# Altium PCB 8161芯片-FSK调试板-V20.PcbDoc
Units mm, origin at the board's own origin, x right, y up, seen from the top; angles counter-clockwise.
Board outline 30 x 31.6 mm, 2 copper layers (Top Layer, Bottom Layer), stack 1.001 mm thick; 63 components, 49 nets, 207 pads, 327 vias.
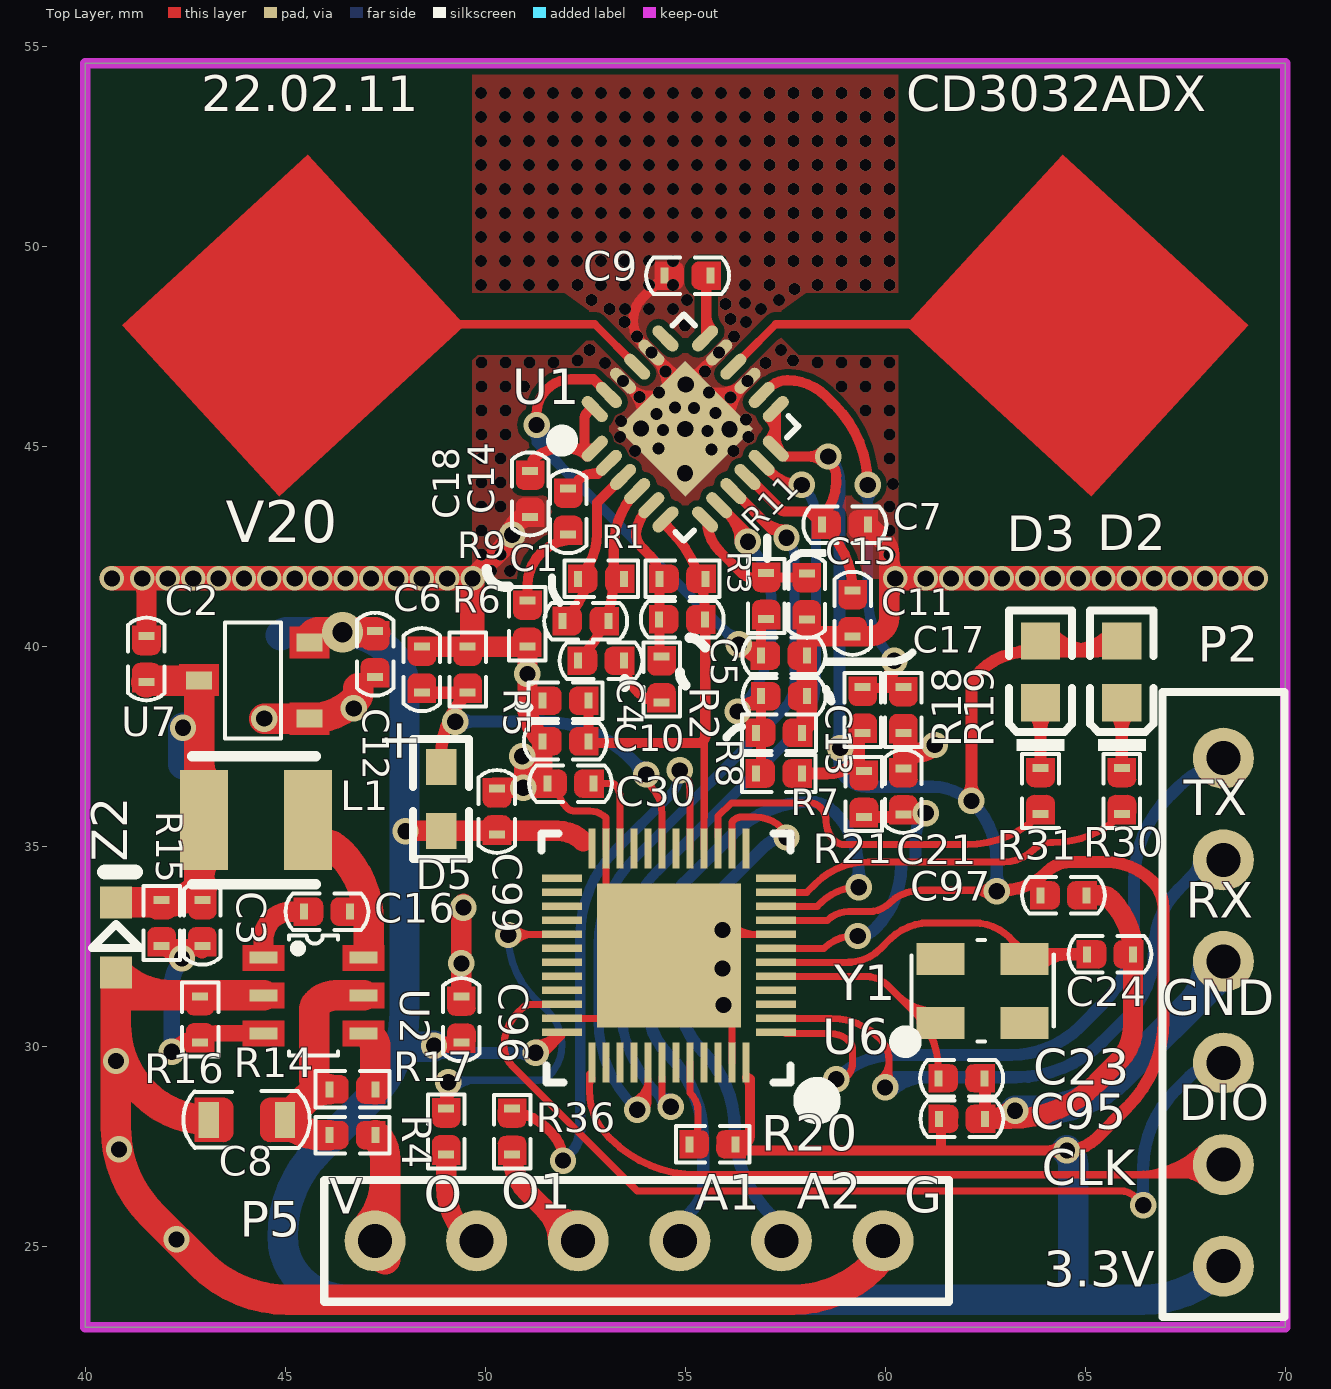
[diagram p0: Top Layer view]
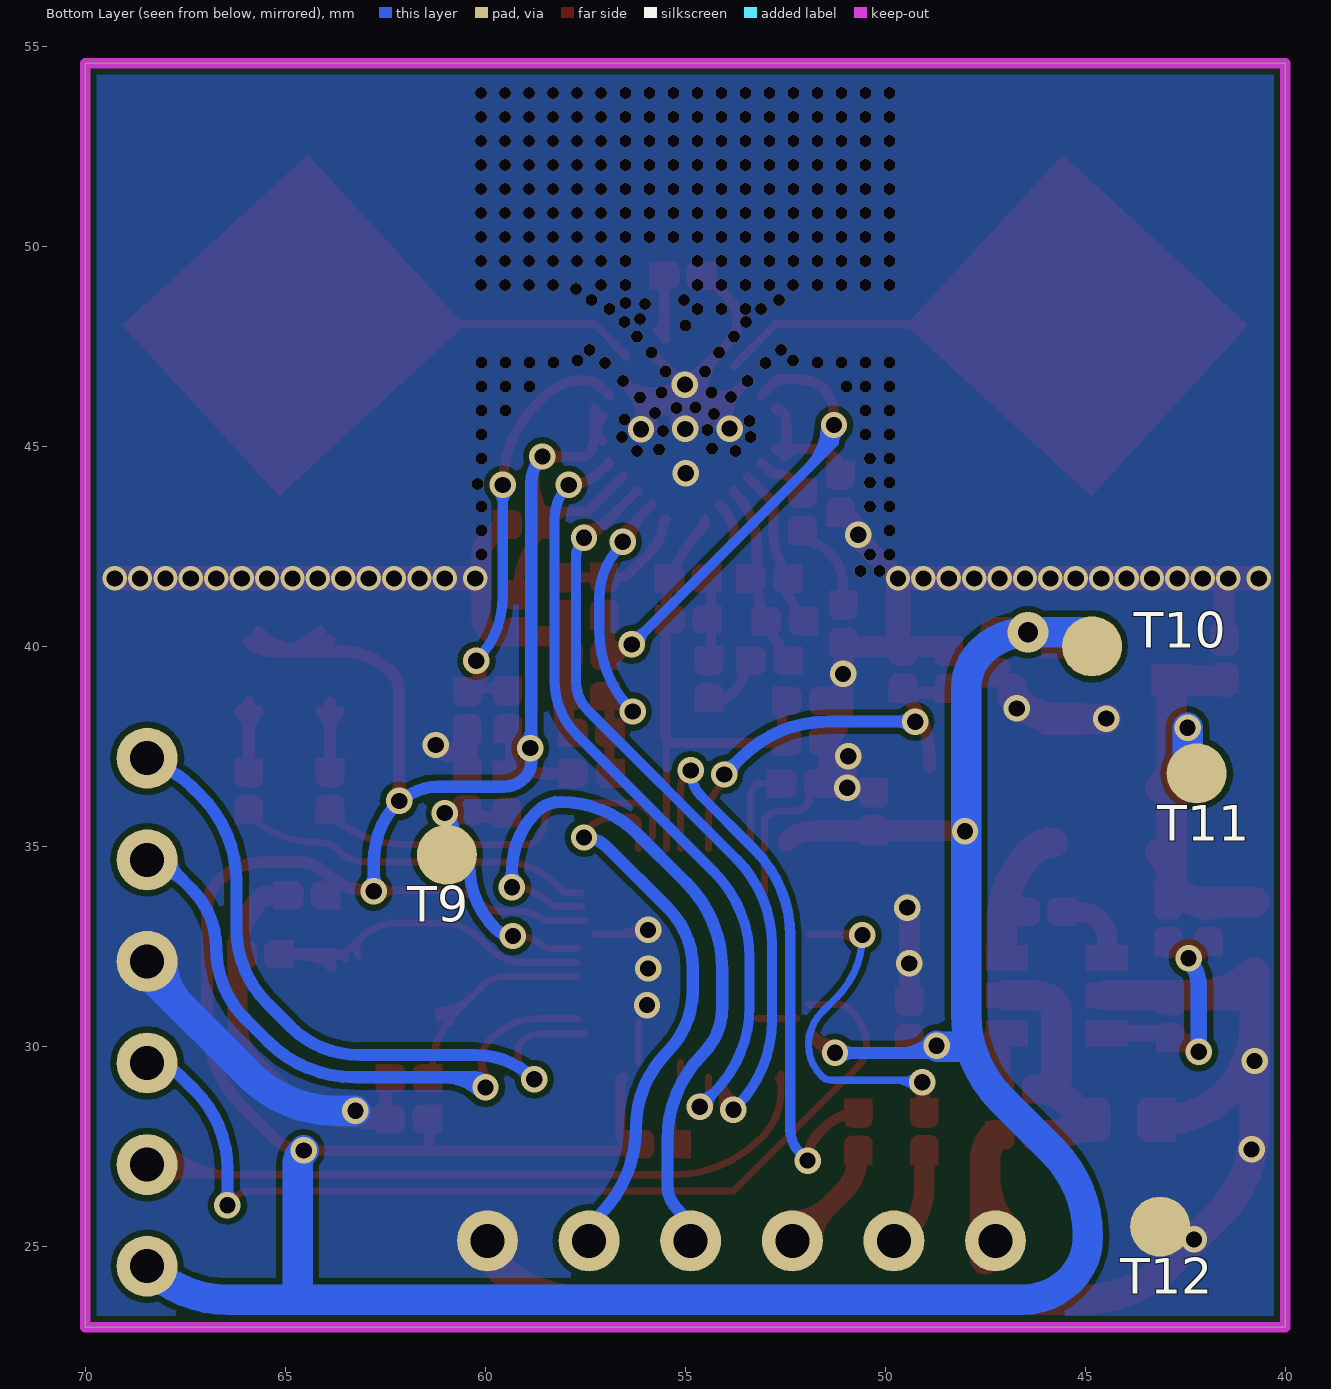
[diagram p1: Bottom Layer view, seen from below]

## Layer stack, top to bottom
Top Layer: signal copper 0.0356
Dielectric: core 0.93, FR-4, Dk 4.8
Bottom Layer: signal copper 0.0356

## Board outline
40,22.987 40,54.585 70,54.585 70,22.987

## Design rules (kind name [scope] priority, off if disabled: settings)
Clearance [All] p1: gap=0.152
ComponentClearance [All] p1: gap=0.254 collisioncheckmode=3 verticalgap=0.254
PolygonConnect [All] p1: connectstyle=Direct reliefconductorwidth=0.254 reliefentries=4 polygonreliefangle="90 Angle"
RoutingVias [All] p1: holewidth=0.711 width=1.27 viastyle="Through Hole" minholewidth=0.381 minwidth=0.66 maxholewidth=0.711 maxwidth=1.27
SolderMaskExpansion [All] p1: expansion=0.102
TestPointUsage [All] p1: valid=0 allowmultiple=FALSE
Testpoint [All] p1: side=3 testpointundercomponent=TRUE minsize=1.016 maxsize=2.54 preferedsize=1.524 minholesize=0 maxholesize=1.016 preferedholesize=0.813 testpointgrid=0.025 style=297 order=0123456789
Width [All] p1: maxlimit=0.762 minlimit=0.178 preferedwidth=0.254
18 further rules are at their usual default settings.

## Components (designator, comment, footprint, x,y, rotation, side; value= is the part's Value field where it differs from the comment)
C1 "10nF" C0402#1 53.086,40.64 r180 top (schematic designator C16)
C2 "10uF" C0402#1 41.529,39.116 r90 top (schematic designator C16)
C3 "22pF" C0402#1 42.926,32.512 r90 top (schematic designator C16)
C4 "10uF" C0402#1 53.467,39.649 r180 top (schematic designator C16)
C5 "51nF" C0402#1 55.499,40.681 r180 top (schematic designator C16)
C6 "0.1uF" C0402#1 48.415,38.85 r90 top (schematic designator C16)
C7 "100nF" C0402#1 59.563,43.053 r180 top (schematic designator C16)
C8 "10uF/16V" C0603 44.966,28.169 r180 top
C9 "10uF" C0402#1 54.483,49.276 r0 top (schematic designator C16)
C10 "0.1uF" C0402#1 52.578,37.633 r180 top
C11 "10uF" C0402#1 59.182,40.259 r90 top (schematic designator C16)
C12 "10uF" C0402#1 47.244,40.386 r270 top (schematic designator C16)
C13 "10uF" C0402#1 56.896,38.76 r0 top (schematic designator C16)
C14 "10uF" C0402#1 52.07,42.799 r90 top (schematic designator C16)
C15 "10uF" C0402#1 58.039,41.834 r270 top (schematic designator C16)
C16 "0.1uF" C0402#1 46.617,33.376 r180 top
C17 "10uF" C0402#1 58.039,39.776 r180 top (schematic designator C16)
C18 "10uF" C0402#1 51.12,43.246 r90 top (schematic designator C16)
C21 "100nF" C0402#2 60.452,36.957 r270 top
C23 "12pF" C0402#2 62.484,29.21 r180 top
C24 "12pF" C0402#2 66.192,32.309 r180 top
C30 "100nF" C0402#2 52.705,36.576 r180 top
C95 "10uF/6.3V" C0402#2 61.341,28.194 r0 top
C96 "0.1uF/50V" C0402#2 49.403,30.099 r90 top
C97 "0.1uF/50V" C0402#2 63.881,33.782 r0 top
C99 "0.1uF/50V" C0402#2 50.292,35.306 r90 top
D2 "红灯" LC-0603_LED_S1 65.913,39.37 r90 top
D3 "绿灯" LC-0603_LED_S1 63.881,39.37 r90 top
D5 "PT19-21C" LED-0603 48.895,36.195 r270 top
L1 "PRS3015-100MT" PRS3015 45.669,35.662 r180 top
P2 "DIP1X6-2.54mm" DIP1X6-2.54 68.453,24.511 r90 top locked
P5 "DIP1X6-2.54mm" DIP1X6-2.54 47.244,25.146 r0 top locked
R1 "100k" R0402#1 52.324,41.697 r0 top (schematic designator R14)
R2 "10k" R0402#1 54.407,38.608 r90 top (schematic designator R14)
R3 "NC" R0402#1 54.356,41.697 r0 top (schematic designator R14)
R4 "5.6" R0402#1 47.252,27.788 r180 top (schematic designator R14)
R5 "12K" R0402#1 52.578,38.649 r180 top (schematic designator R14)
R6 "47k" R0402#1 49.558,38.85 r90 top (schematic designator R14)
R7 "20k" R0402#1 57.912,36.83 r180 top (schematic designator R14)
R8 "10k" R0402#1 56.769,37.846 r0 top (schematic designator R14)
R9 "0R" R0402#1 51.054,41.148 r270 top (schematic designator R14)
R11 "10k" R0402#1 57.023,40.691 r90 top (schematic designator R14)
R14 "47k" R0402#1 47.252,28.931 r180 top
R15 "25.5k" R0402#1 41.91,32.512 r90 top
R16 "5.1k" R0402#1 42.87,31.259 r270 top
R17 "200" R0402#1 49.022,27.305 r90 top (schematic designator R14)
R18 "10k/NA" R0402#1 59.436,37.846 r90 top (schematic designator R14)
R19 "10K/NA" R0402#1 60.452,38.989 r270 top (schematic designator R14)
R20 "4.7K" R0402#2 56.261,27.559 r180 top
R21 "4.7KΩ" R0402#2 59.465,35.743 r90 top
R30 "1KΩ" R0402#2 65.913,35.814 r90 top
R31 "1KΩ" R0402#2 63.881,35.814 r90 top
R36 "100R" R0402#2 50.673,28.448 r270 top
T9 "" TestPoints 61.087,34.671 r180 bottom
T10 "" TestPoints 44.958,39.878 r180 bottom (schematic designator T9)
T11 "" TestPoints 42.342,36.703 r180 bottom (schematic designator T9)
T12 "" TestPoints 43.256,25.375 r180 bottom (schematic designator T9)
U1 "XBR8161" QFN24 56.556,46.717 r45 top (schematic designator QFN-1)
U2 "SY8120B1ABC" SOT-23-6 44.458,32.233 r0 top
U6 "HC32F460JEUA-QFN48TR" QFN48-5X5mm 57.252,32.283 r180 top
U7 "ME6216A33M3G" SOT-23-L 45.601,38.202 r180 top (schematic designator U6)
Y1 "8MHZ-1C208000CE0R" OSC-SMD_3225 62.433,31.394 r0 top
Z2 "ESD5Z5.0T1G" SOD323 40.767,33.909 r270 top

## Footprints (in the part's own frame and the unit in brackets; to place one, negate y for a bottom-side part, rotate by r counter-clockwise, add the part's x,y. Pads: shape width x height; smd on the part's side, far side on the other; paste and mask are expansions set on the pad)
C0402#1 [mm]
  rect 0.2x0.4 smd: 1(0,0) 2(1.15,0)
  Top Layer region: 0.873,0.352 0.873,-0.351 1.401,-0.351 1.401,0.352
  Top Layer region: 1.402,-0.352 1.402,0.351 0.874,0.351 0.797,0.336 0.732,0.292 0.689,0.227 0.673,0.151 0.673,0.151 0.673,-0.152 0.689,-0.228 0.732,-0.293 0.797,-0.337 0.874,-0.352 0.874,-0.352
  Top Layer region: -0.252,0.352 -0.252,-0.351 0.276,-0.351 0.353,-0.336 0.418,-0.292 0.461,-0.227 0.477,-0.151 0.477,-0.151 0.477,0.152 0.461,0.228 0.418,0.293 0.353,0.337 0.276,0.352 0.276,0.352
  silkscreen extent -0.46,-0.46 1.61,0.46, body extent 0.08,-0.3 1.08,0.3, height 0.2
C0402#2 [mm]
  rect 0.2x0.4 smd: 1(0,0) 2(1.15,0)
  Top Layer region: 1.402,-0.352 1.402,0.351 0.874,0.355 0.796,0.34 0.729,0.295 0.685,0.229 0.669,0.151 0.673,0.151 0.669,-0.152 0.685,-0.23 0.729,-0.296 0.796,-0.34 0.874,-0.356 0.874,-0.352
  Top Layer region: -0.252,0.352 -0.252,-0.351 0.276,-0.355 0.354,-0.34 0.421,-0.295 0.465,-0.229 0.481,-0.151 0.477,-0.151 0.481,0.152 0.465,0.23 0.421,0.296 0.354,0.34 0.276,0.356 0.276,0.352
  silkscreen extent -0.46,-0.46 1.61,0.46, body extent 0.08,-0.3 1.08,0.3, height 0.2
C0603 [mil]
  rect 19.8x35.55 smd mask+0: 1(-0.92,0) 2(74,0)
  Top Layer region: 59.72,-21.73 58.17,-21.61 56.67,-21.25 55.24,-20.66 53.92,-19.85 52.74,-18.84 51.73,-17.66 50.92,-16.34 50.33,-14.91 49.97,-13.4 49.85,-11.86 49.88,-11.86 49.85,11.88 49.97,13.43 50.33,14.93 50.92,16.36 51.73,17.68 52.74,18.86 53.92,19.87 55.24,20.68 56.67,21.27 58.17,21.63 59.72,21.75 59.72,21.72 87.79,21.72 87.79,-21.7
  Top Layer region: 13.34,-21.73 14.89,-21.61 16.39,-21.25 17.82,-20.66 19.14,-19.85 20.32,-18.84 21.33,-17.66 22.14,-16.34 22.73,-14.91 23.09,-13.4 23.21,-11.86 23.18,-11.86 23.21,11.88 23.09,13.43 22.73,14.93 22.14,16.36 21.33,17.68 20.32,18.86 19.14,19.87 17.82,20.68 16.39,21.27 14.89,21.63 13.34,21.75 13.34,21.72 -14.73,21.72 -14.73,-21.7
  silkscreen extent -25,-28 99,28, body extent 6,-15 68,16, height 12
DIP1X6-2.54 [mil]
  round 60 hole 33.46: 1(0,0) 2(100,0) 3(200,0) 4(300,0) 5(400,0) 6(500,0)
  silkscreen extent -50,-60 565,60
LC-0603_LED_S1 [mm]
  rect 0.93x0.98 smd: A(0.77,0) K(-0.77,0)
  silkscreen extent -1.97,-0.79 1.54,0.79, body extent -0.8,-0.4 0.8,0.4, height 0.6
LED-0603 [mm]
  rect 0.9x0.762 smd: 1(-0.8,0) 2(0.8,0)
  silkscreen extent -1.5,-0.7 1.5,0.7
OSC-SMD_3225 [mm] "OSC-SMD-3225"
  rect 1.2x0.8 smd: 1(-1.05,-0.8) 2(1.05,-0.8) 3(1.05,0.8) 4(-1.05,0.8)
  silkscreen extent -1.98,-1.37 1.78,1.27
PRS3015 [mm]
  rect 1.2x2.5 smd: 1(0.1,0) 2(2.7,0)
  silkscreen extent -0.1,-1.6 3,1.6, body extent -0.1,-1.5 2.9,1.5, height 1.5
QFN24 [mm]
  oval 0.8x0.3 smd: 1(-3.95,1.45) 2(-3.95,0.95) 3(-3.95,0.45) 4(-3.95,-0.05) 5(-3.95,-0.55) 6(-3.95,-1.05) 13(-0.05,-1.05) 14(-0.05,-0.55) 15(-0.05,-0.05) 16(-0.05,0.45) 17(-0.05,0.95) 18(-0.05,1.45)
  oval 0.3x0.8 smd: 7(-3.25,-1.75) 8(-2.75,-1.75) 9(-2.25,-1.75) 10(-1.75,-1.75) 11(-1.25,-1.75) 12(-0.75,-1.75) 19(-0.75,2.15) 20(-1.25,2.15) 21(-1.75,2.15) 22(-2.25,2.15) 23(-2.75,2.15) 24(-3.25,2.15)
  rect 2.4x2.4 smd: 25(-2,0.2)
  silkscreen extent -4.59,-1.75 0.05,2.37
QFN48-5X5mm [mm] "QFN48-5X5mm"
  rect 1x0.18 smd: 1(-0.02,1.925) 2(-0.02,1.575) 3(-0.02,1.225) 4(-0.02,0.875) 5(-0.02,0.525) 6(-0.02,0.175) 7(-0.02,-0.175) 8(-0.02,-0.525) 9(-0.02,-0.875) 10(-0.02,-1.225) 11(-0.02,-1.575) 12(-0.02,-1.925) 25(5.33,-1.925) 26(5.33,-1.575) 27(5.33,-1.225) 28(5.33,-0.875) 29(5.33,-0.525) 30(5.33,-0.175) 31(5.33,0.175) 32(5.33,0.525) 33(5.33,0.875) 34(5.33,1.225) 35(5.33,1.575) 36(5.33,1.925)
  rect 0.18x1 smd: 13(0.73,-2.675) 14(1.08,-2.675) 15(1.43,-2.675) 16(1.78,-2.675) 17(2.13,-2.675) 18(2.48,-2.675) 19(2.83,-2.675) 20(3.18,-2.675) 21(3.53,-2.675) 22(3.88,-2.675) 23(4.23,-2.675) 24(4.58,-2.667) 37(4.58,2.675) 38(4.23,2.675) 39(3.88,2.675) 40(3.53,2.675) 41(3.18,2.675) 42(2.83,2.675) 43(2.48,2.675) 44(2.13,2.675) 45(1.78,2.675) 46(1.43,2.675) 47(1.08,2.675) 48(0.73,2.675)
  rect 3.6x3.6 smd: 49(2.655,0)
  silkscreen extent -1.07,-3.05 5.84,3.7
R0402#1 [mm]
  rect 0.2x0.4 smd: 1(0,0) 2(1.15,0)
  Top Layer region: 0.873,0.352 0.873,-0.351 1.401,-0.351 1.401,0.352
  Top Layer region: 1.402,-0.352 1.402,0.351 0.874,0.351 0.797,0.336 0.732,0.292 0.689,0.227 0.673,0.151 0.673,0.151 0.673,-0.152 0.689,-0.228 0.732,-0.293 0.797,-0.337 0.874,-0.352 0.874,-0.352
  Top Layer region: -0.252,0.352 -0.252,-0.351 0.276,-0.351 0.353,-0.336 0.418,-0.292 0.461,-0.227 0.477,-0.151 0.477,-0.151 0.477,0.152 0.461,0.228 0.418,0.293 0.353,0.337 0.276,0.352 0.276,0.352
  silkscreen extent -0.35,-0.46 1.5,0.46, body extent 0.12,-0.26 1.12,0.24, height 0.35
R0402#2 [mm]
  rect 0.2x0.4 smd: 1(0,0) 2(1.15,0)
  Top Layer region: -0.252,0.352 -0.252,-0.351 0.276,-0.355 0.354,-0.34 0.421,-0.295 0.465,-0.229 0.481,-0.151 0.477,-0.151 0.481,0.152 0.465,0.23 0.421,0.296 0.354,0.34 0.276,0.356 0.276,0.352
  Top Layer region: 1.402,-0.352 1.402,0.351 0.874,0.355 0.796,0.34 0.729,0.295 0.685,0.229 0.669,0.151 0.673,0.151 0.669,-0.152 0.685,-0.23 0.729,-0.296 0.796,-0.34 0.874,-0.356 0.874,-0.352
  silkscreen extent -0.35,-0.46 1.5,0.46, body extent 0.12,-0.26 1.12,0.24, height 0.35
SOD323 [mm]
  rect 0.8x0.8 smd: A(2.06,0) K(0.3,0)
  silkscreen extent 0.84,-0.6 1.44,0.6, body extent -0.17,-0.62 2.53,0.63, height 1.1
SOT-23-6 [mm]
  rect 0.7x0.3 smd: 1(0,0) 2(0,-0.95) 3(0,-1.9) 4(2.5,-1.9) 5(2.5,-0.95) 6(2.5,0)
  Top Layer region: 1.972,-1.276 3.025,-1.276 3.025,-0.623 1.972,-0.623
  Top Layer region: -0.527,-0.341 0.526,-0.341 0.526,0.312 -0.527,0.312
  Top Layer region: -0.527,-1.276 0.526,-1.276 0.526,-0.623 -0.527,-0.623
  Top Layer region: -0.527,-2.226 0.526,-2.226 0.526,-1.573 -0.527,-1.573
  Top Layer region: 1.972,-0.341 3.025,-0.341 3.025,0.311 1.972,0.311
  Top Layer region: 1.972,-2.226 3.025,-2.226 3.025,-1.573 1.972,-1.573
  silkscreen extent 0.63,-2.45 1.86,0.54, body extent -0.16,-2.39 2.64,0.51, height 1.45
SOT-23-L [mm]
  rect 0.65x0.45 smd: 1(0,0) 2(0,-1.9) 3(2.757,-0.95)
  Top Layer region: 2.254,-1.367 3.257,-1.367 3.257,-0.564 2.254,-0.564
  Top Layer region: -0.507,-2.303 0.496,-2.303 0.496,-1.5 -0.507,-1.5
  Top Layer region: -0.507,-0.398 0.496,-0.398 0.496,0.405 -0.507,0.405
  silkscreen extent 0.71,-2.4 2.11,0.5, body extent 0.17,-2.44 2.67,0.56, height 1.05
TestPoints [mm] "TestPoints"
  round 1.5 smd: 1(0.127,0.127)

## Part data
C1 C2 C3 C4 C5 C6 C7 C8 C9 C10 C11 C12 C13 C14 C15 C16 C17 C18 C30: library part Cap, "Capacitor"
C21: library part "0402 100nF (104) 10% 16V", "贴片电容"
C23 C24: library part "0402 22pF (220) 5% 50V", "贴片电容"
C95 C96 C97 C99: library part "0402 2.2nF (222) 10% 50V", "贴片电容"
D2 D3: library part "0603 红灯", "发光二极管"
D5: library part "Photo Sen", "Photosensitive Diode"
L1: library part Inductor, "Inductor"
R1 R2 R3 R4 R5 R6 R7 R8 R9 R11 R14 R15 R16 R17 R18 R19 R20: library part Res2, "Resistor"
R21 R36: library part "0402 4.7KΩ (4701) 1%", "贴片电阻"
R30 R31: library part "0402 1KΩ (1001) 1%", "贴片电阻"
T9 T10 T11 T12: library part TestPoints, "TestPoints"
U1: library part XBR1000
U2: library part H9108
U6: library part HC32F460JETA-LQFP48
U7: library part SSP6206
Y1: library part "SMD-3225_4P  25MHZ 12PF 10PPM", "贴片晶振"
Z2: library part "D Zener", "Zener Diode"

## Via types
v1: diameter 0.3, hole 0.3, Top Layer to Bottom Layer, 241 vias
v2: diameter 0.66, hole 0.406, Top Layer to Bottom Layer, tented both sides, 55 vias
v3: diameter 0.61, hole 0.406, Top Layer to Bottom Layer, tented both sides, 30 vias
v4: diameter 1.016, hole 0.508, Top Layer to Bottom Layer, tented both sides, 1 vias

## Nets (pads, with @x,y where several pads share a name; then routed paths per layer and width w, separated by ;. In a path a pad name is that pad's centre, name@x,y a point inside that pad or via, vN(x,y) a via of type N, cw(c..) or ccw(c..) an arc to the next point about the centre after c; other vN are vias at no path point)
3.3V: C7.2 C11.2 C12.1 C95.1 C96.1 C97.1 C99.1 D2.A D3.A D5.2 P2.1 R7.1 R18.1 R20.1 R21.2 T10.1 U1.10 U1.12 U1.13 U6.9 U6.24 U6.36 U6.48 U7.2 | length 145.1
  Top Layer w0.178: U6.9@57.48,33.158 58.558,33.158 cw(c59.083,32.634) 59.083,33.376 59.595,33.376 ccw(c59.595,34.095) 60.104,33.586 cw(c60.883,32.807) 60.883,33.909 v2@62.89,33.909 ; 62.145,33.909 cw(c62.145,33.24) 62.618,33.713 ccw(c62.145,33.24) 62.145,33.909 ; 62.268,33.909 ccw(c62.268,34.405) 62.618,34.054 cw(c62.268,34.405) 62.268,33.909
  Top Layer w0.254: R20.1@56.236,27.407 v2(64.541,27.407) ; 56.513,27.559 ccw(c56.263,27.809) 56.617,27.809 56.617,29.185 ; U6.48@56.548,29.225 cw(c56.382,29.058) 56.617,29.058 ; U1.10 cw(c56.556,44.206) 56.581,44.231 57.388,43.424 ; U1.13 57.263,45.244 ccw(c57.918,45.244) 57.455,44.78 ccw(c57.516,44.842) 57.516,44.755 58.122,44.755 ; 57.388,43.424 ccw(c57.488,43.524) 57.488,43.383 58.496,43.383 ; 58.09,43.383 ccw(c58.107,43.383) 58.095,43.371 58.563,42.903 cw(c57.07,41.409) C11.2 ; C7.2@58.373,43.184 ccw(c57.401,44.156) 58.77,44.28 ; 58.776,44.281 ccw(c58.429,44.281) 58.674,44.526 ccw(c58.122,43.974) 58.122,44.755 ; 61.392,27.407 C95.1@61.392,28.071 ; 58.082,44.755 cw(c58.082,44.264) 58.429,44.611 ccw(c58.082,44.264) 58.082,44.755 ; 58.082,44.755 ccw(c58.082,45.245) 58.429,44.898 cw(c58.082,45.245) 58.082,44.755 ; 58.122,44.755 cw(c58.122,44.358) 58.42,44.62 ccw(c58.122,44.358) 58.122,44.755 ; 58.122,44.755 ccw(c58.122,45.152) 58.42,44.889 cw(c58.122,45.152) 58.122,44.755 ; C95.1@61.392,28.071 ccw(c61.218,28.071) C95.1 cw(c61.218,28.071) C95.1@61.392,28.071 ; 64.051,27.407 cw(c64.051,26.916) 64.398,27.263 ccw(c64.051,26.916) 64.051,27.407 ; 64.051,27.407 ccw(c64.051,27.897) 64.398,27.55 cw(c64.051,27.897) 64.051,27.407 ; U1.12@57.07,45.142 ccw(c56.604,45.608) 57.263,45.608 cw(c56.604,45.608) U1.12@57.07,45.142 ; U1.13@57.07,45.746 cw(c56.604,45.28) 57.263,45.28 ccw(c56.604,45.28) U1.13@57.07,45.746 ; U1.13@57.249,45.926 cw(c57.217,45.893) 57.263,45.893 ccw(c57.217,45.893) U1.13@57.249,45.926 ; 58.288,43.178 ccw(c58.413,43.302) 58.413,43.126 cw(c58.413,43.302) 58.288,43.178 ; C7.2@58.413,42.98 cw(c58.413,42.804) 58.538,42.928 ccw(c58.413,42.804) C7.2@58.413,42.98
  Top Layer w0.305: v2(48.717,30.023) cw(c48.901,29.839) 48.901,30.099 C96.1 ; v2(51.257,29.845) ccw(c51.257,30.21) 51.515,29.952 U6.36@51.851,30.288 ; R7.1 58.54,36.83 ccw(c58.54,37.889) 59.289,37.14 ; 59.338,37.091 59.338,37.973 ; v2(62.154,36.144) 62.154,38.879 cw(c62.848,38.879) 62.357,39.37 cw(c63.603,38.124) 63.603,39.886 65.3,39.886 ; v2@62.89,33.909 62.93,33.909 ccw(c62.93,35.47) 64.033,34.366 cw(c64.647,33.753) 64.647,34.62 65.51,34.62 cw(c65.51,32.972) 66.675,34.138 cw(c66,33.463) 66.954,33.463 66.954,30.658 cw(c63.888,30.658) 66.056,28.49 65.279,27.712 cw(c64.541,28.449) v2(64.541,27.407) ; D3.A@63.912,40.146 ccw(c64.538,40.772) 64.538,39.886 ; D3.A@64.127,40.361 ccw(c65.274,41.508) 65.274,39.886 ; 64.52,39.886 ccw(c64.52,41.508) D2.A@65.667,40.361 ; 65.256,39.886 ccw(c65.256,40.772) D2.A@65.882,40.146 ; D2.A@65.576,40.152 cw(c65.3,40.162) 65.3,39.886 ; D2.A cw(c65.3,40.753) 65.3,39.886 ; 62.154,36.573 cw(c61.725,36.573) 62.028,36.27 ccw(c61.725,36.573) 62.154,36.573 ; 62.154,36.573 ccw(c62.583,36.573) 62.28,36.27 cw(c62.583,36.573) 62.154,36.573 ; v2@48.843,29.897 cw(c49.33,29.41) 49.33,30.099 ccw(c49.33,29.41) v2@48.843,29.897 ; v2@51.257,30.023 ccw(c51.257,30.817) 51.818,30.255 cw(c51.257,30.817) v2@51.257,30.023
  Top Layer w0.508: v2@48.057,35.433 ccw(c48.149,35.525) 48.149,35.395 51.807,35.395 cw(c51.807,34.484) 52.451,35.128
  Top Layer w0.762: U7.2 cw(c45.876,40.102) 45.681,40.297 cw(c45.836,40.142) 45.836,40.361 C12.1@47.244,40.361 ; U7.2@45.59,40.212 cw(c45.949,39.853) 45.949,40.361 ccw(c45.949,39.853) U7.2@45.59,40.212
  Bottom Layer w0.305: 48.031,29.997 ccw(c48.399,30.365) 48.399,29.845 v2(51.257,29.845) ; v2(58.572,44.755) cw(c57.898,44.08) 58.852,44.08 58.852,37.109 ; v2(58.877,37.465) 58.852,37.109 ; v2@62.154,36.093 ccw(c61.173,35.112) 61.173,36.5 59.543,36.5 cw(c59.543,37.249) 59.013,36.719 cw(c59.404,37.109) 58.852,37.109 ; v2(62.154,36.144) cw(c60.621,34.611) 62.789,34.611 v2(62.789,33.884) ; 50.828,29.845 cw(c50.828,29.416) 51.131,29.719 ccw(c50.828,29.416) 50.828,29.845 ; 50.828,29.845 ccw(c50.828,30.274) 51.131,29.971 cw(c50.828,30.274) 50.828,29.845 ; 58.852,37.109 cw(c59.088,37.109) 58.968,37.312 ccw(c59.088,37.109) 58.852,37.109 ; 58.852,37.109 ccw(c58.536,37.109) 58.754,37.336 cw(c58.536,37.109) 58.852,37.109 ; 58.852,37.109 cw(c59.12,37.09) 58.974,37.316 ccw(c59.12,37.09) 58.852,37.109 ; 58.852,37.109 ccw(c58.584,37.129) 58.76,37.331 cw(c58.584,37.129) 58.852,37.109 ; 62.789,34.313 cw(c62.36,34.313) 62.663,34.009 ccw(c62.36,34.313) 62.789,34.313 ; 62.789,34.313 ccw(c63.218,34.313) 62.915,34.009 cw(c63.218,34.313) 62.789,34.313 ; v2@48.843,30.149 ccw(c49.576,30.881) 49.576,29.845 cw(c49.576,30.881) v2@48.843,30.149 ; v2@58.751,37.591 ccw(c58.509,37.833) 58.852,37.833 cw(c58.509,37.833) v2@58.751,37.591 ; 58.852,37.956 ccw(c59.368,37.956) 59.003,37.591 cw(c59.368,37.956) 58.852,37.956
  Bottom Layer w0.762: T10.1@44.882,40.284 cw(c45.066,40.1) 45.066,40.361 v4(46.431,40.361) cw(c46.431,38.705) 47.602,39.876 cw(c46.688,38.961) 47.981,38.961 47.981,30.836 cw(c44.915,30.836) 47.083,28.668 45.831,27.416 ccw(c47.999,25.248) 44.933,25.248 ccw(c46.466,25.248) 45.382,24.164 ccw(c46.566,25.348) 46.566,23.673 66.429,23.673 ccw(c66.429,26.535) P2.1 ; 48.031,29.997 48.656,29.997 ccw(c48.656,30.084) v2(48.717,30.023) ; v2(64.541,27.407) cw(c64.173,27.039) 64.694,27.039 64.694,23.673
  other v2: 48.006,35.382
3.6V: C2.1 C3.2 L1.2 R15.2 T11.1 U7.3 Z2.K | length 12.6
  Top Layer w0.762: Z2.K 41.956,33.609 ccw(c41.956,34.98) 42.926,34.011 cw(c43.125,34.21) 42.844,34.21 U7.3 41.615,39.152 ccw(c41.615,39.03) C2.1 ; 42.844,34.2 cw(c43.753,34.2) 43.121,34.854 ccw(c43.753,34.2) 42.844,34.2 ; 42.844,37.144 ccw(c43.801,37.144) 43.124,36.466 cw(c43.801,37.144) 42.844,37.144
  Bottom Layer w0.762: T11.1@42.443,37.059 v2(42.443,37.973)
5-15V: P5.1 R4.1 | length 6
  Top Layer w0.762: R4.1 cw(c46.657,27.193) 47.498,27.193 P5.1@47.498,24.689 ; P5.1@46.975,25.415 ccw(c45.711,26.679) 47.498,26.679 cw(c45.711,26.679) P5.1@46.975,25.415
ADC1: P5.4 U6.10 | length 19.6
  Top Layer w0.178: U6.10@57.582,33.508 58.299,33.508 ; 58.304,33.514 58.38,33.59 cw(c59.334,32.636) v2(59.334,33.985) ccw(c59.334,33.683) v2@59.121,33.897
  Bottom Layer w0.305: P5.4 cw(c55.968,25.146) 55.187,25.926 ccw(c54.557,26.556) 55.448,26.556 55.448,27.661 ccw(c52.382,27.661) 54.55,29.829 cw(c55.693,30.972) 54.077,30.972 54.077,31.928 cw(c57.143,31.928) 54.975,34.096 56.207,35.329 cw(c58.115,33.421) 58.115,36.119 cw(c58.115,35.26) 58.722,35.867 cw(c57.244,34.389) 59.334,34.389 ; v2(59.334,33.985) 59.334,34.389 ; 59.334,34.389 cw(c58.964,34.389) 59.214,34.116 ccw(c58.964,34.389) 59.334,34.389 ; 59.334,34.389 ccw(c59.705,34.389) 59.455,34.116 cw(c59.705,34.389) 59.334,34.389
ADC2: P5.5 U6.14 | length 14.3
  Top Layer w0.178: U6.14 56.172,35.603 cw(c56.191,35.603) 56.177,35.617 56.178,35.618 cw(c56.207,35.618) 56.187,35.638 56.21,35.662 cw(c56.394,35.478) 56.394,35.738 56.748,35.738 cw(c56.748,34.767) 57.434,35.454 57.441,35.447 cw(c57.224,35.23) v2(57.531,35.23)
  Bottom Layer w0.305: P5.5 ccw(c56.484,25.146) 57.135,25.796 57.134,25.797 cw(c59.302,27.965) 56.236,27.965 ccw(c53.537,27.965) 55.445,29.873 cw(c56.971,31.399) 54.813,31.399 54.813,31.98 cw(c56.895,31.98) 55.423,33.452 56.967,34.996 cw(c57.531,34.433) v2(57.531,35.23)
ADC3: U6.18
FSK_PWM: U1.9 U6.41 | length 21.8
  Top Layer w0.178: v2@53.708,28.647 ccw(c53.492,29.185) 54.072,29.185 54.072,28.697 v2@53.772,28.397 ; v2@53.774,28.482 ccw(c53.597,28.922) 54.072,28.922 ; v2@53.84,28.316 ccw(c53.702,28.659) 54.072,28.659
  Top Layer w0.254: U1.9 cw(c56.202,43.862) 56.221,43.881 57.187,42.914 ; 56.924,43.177 ccw(c57.531,43.784) 57.531,42.926 cw(c57.531,43.784) 56.924,43.177
  Bottom Layer w0.254: v2(53.797,28.423) 53.73,28.49 cw(c55.898,30.658) 52.832,30.658 52.832,32.537 cw(c55.898,32.537) 53.73,34.705 57.447,38.422 ccw(c56.753,39.116) 57.734,39.116 57.734,42.232 ccw(c57.163,42.232) 57.567,42.636 cw(c57.654,42.723) v2(57.531,42.723)
GND: C2.2 C6.2 C7.1 C8.2 C9.1 C10.2 C11.1 C12.2 C13.2 C15.2 C17.1 C18.1 C21.1 C23.1 C24.1 C30.2 C95.2 C96.2 C97.2 C99.2 P2.4 P5.6 R5.2 R6.2 R8.2 R9.2 R16.1 R19.2 T12.1 U1.15 U1.17 U1.20 U1.22 U1.25 U2.2 U6.8 U6.23 U6.35 U6.47 U6.49 U7.1 Z2.A | length 166.3
  Top Layer w0.178: 51.816,36.5 ccw(c52.552,36.5) 52.032,35.979 ccw(c52.247,36.195) 52.247,35.89 52.611,35.89 cw(c52.611,35.318) 53.016,35.723 ; U6.35@52.222,30.709 U6.49@53.188,30.709 ; U6.49@53.022,33.884 U6.23@53.022,34.544 ; U6.23 53.022,35.717 ; U6.49@55.976,32.963 ccw(c56.35,33.337) U6.49@56.35,32.808 ; U6.49@56.058,32.868 ccw(c56.201,33.011) 56.201,32.808 U6.8 ; U6.49@56.101,32.748 cw(c56.248,32.601) U6.49@56.248,32.808 ; U6.49@56.101,33.089 ccw(c56.779,33.767) U6.8@56.779,32.808 ; U6.49@56.159,30.632 cw(c56.13,30.603) 56.172,30.603 U6.47
  Top Layer w0.254: v1(53.444,46.646) v1(54.28,45.822) ; C9.1 53.935,48.728 ccw(c54.514,48.15) 53.696,48.15 ccw(c54.518,48.15) 53.936,47.568 v1(54.151,47.353) 55.016,46.533 55.245,46.761 v1(55.849,47.353) ; v1@54.632,46.898 ccw(c54.99,47.275) U1.25@55.003,46.755 ; 54.662,46.869 cw(c54.345,46.535) U1.25@54.806,46.547 ; U1.25@55.011,46.755 ccw(c55.016,47.3) v1@55.398,46.911 ; U1.25@55.212,46.55 cw(c55.648,46.546) 55.343,46.857 ; v1(55.223,45.963) ccw(c55.51,46.63) U1.25@56.023,46.116 ; U1.25@55.324,46.196 ccw(c55.67,47.002) U1.15@56.289,46.38 ; U1.25@55.424,46.43 ccw(c55.83,47.373) 56.555,46.645 ccw(c57.71,45.485) U1.25@56.073,45.46 ; v1(55.753,45.847) v1(56.556,46.646) ; U1.25@55.819,45.456 cw(c56.878,45.472) v1(56.131,46.223) ; U1.22@53.615,46.477 cw(c52.845,45.697) 53.934,45.569 ccw(c52.845,45.697) U1.22@53.615,46.477 ; U1.22@53.615,46.477 ccw(c54.107,46.975) 54.459,46.371 cw(c54.107,46.975) U1.22@53.615,46.477 ; v1(53.852,46.244) ccw(c54.28,46.678) 54.587,46.152 cw(c54.28,46.678) v1(53.852,46.244) ; U1.25@53.986,46.112 cw(c53.5,45.62) 54.187,45.539 ccw(c53.5,45.62) U1.25@53.986,46.112 ; U1.20@54.084,47.417 cw(c52.973,46.246) 54.475,45.652 ccw(c52.973,46.246) U1.20@54.084,47.417 ; U1.20@54.357,47.158 cw(c53.35,46.097) 54.711,45.558 ccw(c53.35,46.097) U1.20@54.357,47.158 ; 54.358,49.151 cw(c54.483,49.027) 54.483,49.203 ccw(c54.483,49.027) 54.358,49.151 ; v1@54.63,46.899 cw(c53.727,45.948) 54.947,45.465 ccw(c53.727,45.948) v1@54.63,46.899 ; U1.25@54.903,46.641 cw(c54.104,45.799) 55.183,45.372 ccw(c54.104,45.799) U1.25@54.903,46.641
  Top Layer w0.305: C23.1 cw(c62.467,29.193) 62.491,29.193 C95.2
  Top Layer w0.508: v3@41.391,41.671 cw(c41.059,41.339) 41.529,41.339 ; C2.2 41.529,41.487 cw(c41.84,41.487) v3@41.62,41.707 ; C6.2 51.049,40 cw(c51.049,39.993) R9.2 51.054,38.536 ccw(c52.331,38.536) C10.2 51.428,36.878 cw(c51.001,36.878) 51.303,36.576 ; C96.2 49.403,33.456 cw(c49.576,33.456) v2@49.454,33.579 ; v3@49.675,41.708 50.607,42.64 ccw(c50.449,42.799) v2(50.673,42.799) cw(c51.12,42.799) C18.1 C18.1@51.181,43.246 ; C99.2@50.216,36.474 51.31,36.474 ; v2@50.92,37.186 cw(c50.871,36.631) 51.428,36.631 ; v2(50.927,37.262) cw(c50.804,37.139) 50.978,37.139 v2@50.978,36.474 ; R8.2@57.881,37.884 ccw(c57.499,38.266) 58.039,38.266 C15.2@58.039,40.633 ; 58.039,40.259 59.601,40.259 ccw(c59.601,40.779) 59.969,40.411 ccw(c59.663,40.718) 60.096,40.718 60.096,42.316 ccw(c59.606,42.316) 59.953,42.663 C7.1 ; C21.1 R19.2@60.452,37.897 ; 60.769,37.346 ccw(c60.769,38.012) v2(61.239,37.541) ; C95.2 63.119,28.194 ccw(c63.119,31.26) 65.287,29.092 65.838,29.643 ccw(c64.984,30.498) 66.192,30.498 66.192,32.331 ccw(c64.285,32.331) 65.634,33.68 ccw(c65.388,33.435) 65.388,33.782 C97.2 ; 50.477,42.51 ccw(c50.189,42.799) 50.597,42.799 cw(c50.189,42.799) 50.477,42.51 ; 60.096,41.216 cw(c60.739,41.216) 60.285,41.671 ccw(c60.739,41.216) 60.096,41.216 ; v1@60.096,42.197 ccw(c60.739,42.197) 60.285,41.743 cw(c60.739,42.197) v1@60.096,42.197 ; C95.2@62.57,28.194 ccw(c62.57,29.073) 63.192,28.451 cw(c62.57,29.073) C95.2@62.57,28.194
  Top Layer w0.61: v3@40.658,41.708 41.62,41.708 42.062,41.708 43.967,41.708 44.602,41.708 45.872,41.708 46.507,41.708 48.412,41.708 49.047,41.708 49.675,41.708 R6.2@49.675,40.018 ; v3(40.665,41.707) 41.62,41.707 v3(42.062,41.707) v3(43.967,41.707) v3(44.602,41.707) v3(45.872,41.707) v3(46.507,41.707) v3(48.412,41.707) v3(49.047,41.707) v3(49.682,41.707) ; v3@60.223,41.707 v3@69.24,41.708 ; v3(60.249,41.707) v3(69.266,41.707) ; R6.2@49.675,40.018 ccw(c49.7,40.018) 49.682,40 cw(c49.7,40.018) R6.2@49.675,40.018
  Top Layer w0.762: 40.767,30.533 ccw(c43.163,30.533) 41.469,28.839 ccw(c43.086,30.456) C8.2 ; Z2.A 40.767,27.965 ccw(c43.833,27.965) 41.665,25.797 42.892,24.571 ccw(c45.06,26.739) 45.06,23.673 57.688,23.673 ccw(c57.688,26.482) 59.675,24.496 ccw(c59.024,25.146) P5.6 P5.6@59.944,25.086 ; U2.2 40.804,31.283 ; v2(44.475,38.202) U7.1 ccw(c45.601,39.839) 46.758,38.681 ccw(c46.611,38.828) 46.819,38.828 46.819,38.959 ; 40.804,31.283 ccw(c40.804,31.231) 40.767,31.267 cw(c40.804,31.231) 40.804,31.283 ; Z2.A@40.78,31.862 ccw(c42.18,33.262) 42.18,31.283 cw(c42.18,33.262) Z2.A@40.78,31.862
  Bottom Layer w0.508: v2@54.966,44.398 ccw(c55.053,44.398) v2(54.991,44.336) ; v2@56.066,45.453 cw(c56.066,45.394) v2(56.108,45.435)
  Bottom Layer w0.762: v2(63.246,28.397) 63.729,28.397 ccw(c63.729,31.463) 65.897,29.295 68.255,31.654 ccw(c67.778,32.131) P2.4 ; 67.605,31.004 ccw(c66.478,32.131) 68.072,32.131 cw(c66.478,32.131) 67.605,31.004
  other v1: 50.141,41.894 50.619,41.894 49.9,42.3 50.378,42.3 60.1,42.3 49.9,42.9 60.1,42.9 49.9,43.5 50.378,43.5 60.1,43.5 60.198,44.069 49.9,44.1 50.378,44.1 49.9,44.7 50.378,44.7 60.1,44.7 53.746,44.89 56.21,44.89 55.651,44.933 54.331,44.949 53.372,45.237 56.581,45.237 49.9,45.3 50.5,45.3 60.1,45.3 55.56,45.39 54.446,45.415 53.391,45.644 56.515,45.678 49.9,45.9 50.5,45.9 59.5,45.9 60.1,45.9 54.743,45.974 54.349,46.355 55.59,46.355 49.9,46.5 50.5,46.5 50.968,46.5 58.9,46.5 59.5,46.5 60.1,46.5 54.508,46.885 55.492,46.885 49.9,47.1 50.5,47.1 51.1,47.1 51.7,47.1 52.99,47.092 57.01,47.092 58.3,47.1 58.9,47.1 59.5,47.1 60.1,47.1 52.302,47.159 57.698,47.159 52.611,47.421 57.389,47.421 53.788,47.752 56.212,47.752 54.991,48.033 53.486,48.113 56.514,48.113 56.134,48.192 53.111,48.438 53.496,48.447 54.096,48.447 54.696,48.447 56.889,48.438 56.007,48.565 56.49,48.59 52.654,48.666 55.038,48.666 57.346,48.666 57.727,48.946 49.896,49.047 50.496,49.047 51.096,49.047 51.696,49.047 52.302,49.047 52.896,49.047 53.496,49.047 54.096,49.047 54.696,49.047 56.496,49.047 57.104,49.047 58.304,49.047 58.904,49.047 59.504,49.047 60.104,49.047 49.896,49.647 50.496,49.647 51.096,49.647 51.696,49.647 52.296,49.647 52.896,49.647 53.496,49.647 54.096,49.647 54.696,49.647 56.496,49.647 57.104,49.647 57.704,49.647 58.304,49.647 58.904,49.647 59.504,49.647 60.104,49.647 49.896,50.247 50.496,50.247 51.096,50.247 51.696,50.247 52.296,50.247 52.896,50.247 53.496,50.247 54.096,50.247 54.696,50.247 55.296,50.247 55.896,50.247 56.496,50.247 57.104,50.247 57.704,50.247 58.304,50.247 58.904,50.247 59.504,50.247 60.104,50.247 49.896,50.847 50.496,50.847 51.096,50.847 51.696,50.847 52.296,50.847 52.896,50.847 53.496,50.847 54.096,50.847 54.696,50.847 55.296,50.847 55.896,50.847 56.496,50.847 57.104,50.847 57.704,50.847 58.304,50.847 58.904,50.847 59.504,50.847 60.104,50.847 49.896,51.447 50.496,51.447 51.096,51.447 51.696,51.447 52.296,51.447 52.896,51.447 53.496,51.447 54.096,51.447 54.696,51.447 55.296,51.447 55.896,51.447 56.496,51.447 57.104,51.447 57.704,51.447 58.304,51.447 58.904,51.447 59.504,51.447 60.104,51.447 49.896,52.047 50.496,52.047 51.096,52.047 51.696,52.047 52.296,52.047 52.896,52.047 53.496,52.047 54.096,52.047 54.696,52.047 55.296,52.047 55.896,52.047 56.496,52.047 57.104,52.047 57.704,52.047 58.304,52.047 58.904,52.047 59.504,52.047 60.104,52.047 49.896,52.647 50.496,52.647 51.096,52.647 51.696,52.647 52.296,52.647 52.896,52.647 53.496,52.647 54.096,52.647 54.696,52.647 55.296,52.647 55.896,52.647 56.496,52.647 57.104,52.647 57.704,52.647 58.304,52.647 58.904,52.647 59.504,52.647 60.104,52.647 49.896,53.247 50.496,53.247 51.096,53.247 51.696,53.247 52.296,53.247 52.896,53.247 53.496,53.247 54.096,53.247 54.696,53.247 55.296,53.247 55.896,53.247 56.496,53.247 57.104,53.247 57.704,53.247 58.304,53.247 58.904,53.247 59.504,53.247 60.104,53.247 49.896,53.847 50.496,53.847 51.096,53.847 51.696,53.847 52.296,53.847 52.896,53.847 53.496,53.847 54.096,53.847 54.696,53.847 55.296,53.847 55.896,53.847 56.496,53.847 57.104,53.847 57.704,53.847 58.304,53.847 58.904,53.847 59.504,53.847 60.104,53.847
  other v2: 42.281,25.181 40.843,27.432 40.767,29.642 55.956,31.039 55.931,31.953 49.403,32.08 55.931,32.918 49.454,33.477 50.952,36.474 46.711,38.456 51.054,39.319 53.892,45.453 55,45.444 55.009,46.552
  other v3: 41.427,41.707 42.697,41.707 43.332,41.707 45.237,41.707 47.142,41.707 47.777,41.707 61.011,41.707 61.646,41.707 62.281,41.707 62.916,41.707 63.551,41.707 64.186,41.707 64.821,41.707 65.456,41.707 66.091,41.707 66.726,41.707 67.361,41.707 67.996,41.707 68.631,41.707
GREEN_LED: R31.1 U6.15 | length 9.5
  Top Layer w0.178: U6.15@55.822,35.255 55.822,35.763 56.152,36.093 58.115,36.093 cw(c58.115,35.725) 58.375,35.986 cw(c58.022,35.633) 58.522,35.633 ccw(c59.187,35.633) 58.717,35.162 ccw(c58.982,35.427) 58.982,35.052 62.041,35.052 ccw(c62.041,37.654) R31.1
IFCAP: C17.2 R11.1 U1.23 | length 20
  Top Layer w0.254: v2(51.283,45.542) 51.283,45.822 cw(c52.146,45.822) 52.146,46.685 52.705,46.685 U1.23 ; v2(56.337,40.056) 56.554,39.839 ccw(c56.889,40.174) 56.889,39.7 R11.1@56.889,40.742
  Bottom Layer w0.254: v2(51.283,45.542) 51.283,45.11 ; v2(56.337,40.056) 51.283,45.11 ; v2@51.153,45.386 cw(c50.925,45.11) 51.283,45.11 ; v2@51.153,45.386 cw(c50.925,45.11) 51.283,45.11 ; v2@51.153,45.386 cw(c50.925,45.11) 51.283,45.11 ; v2@51.153,45.386 cw(c50.925,45.11) 51.283,45.11 ; 51.283,45.11 cw(c51.64,45.11) v2@51.412,45.386 ; 51.283,45.11 cw(c51.64,45.11) v2@51.412,45.386 ; 51.283,45.11 cw(c51.64,45.11) v2@51.412,45.386 ; 51.283,45.11 cw(c51.64,45.11) v2@51.412,45.386 ; 55.99,40.403 cw(c55.643,40.056) 56.134,40.056 ccw(c55.643,40.056) 55.99,40.403 ; 55.99,40.403 ccw(c56.337,40.75) 56.337,40.259 cw(c56.337,40.75) 55.99,40.403 ; v2@51.232,45.542 ccw(c52.152,45.542) 51.501,44.892 cw(c52.152,45.542) v2@51.232,45.542 ; v2@51.486,45.542 ccw(c53.019,45.542) 51.935,44.458 cw(c53.019,45.542) v2@51.486,45.542
IFON: C18.2 U1.1 U1.24 | length 4.1
  Top Layer w0.254: C18.2@51.181,44.396 51.181,44.669 cw(c51.857,43.993) 51.857,44.949 U1.1 ; 52.476,44.949 52.476,45.678 cw(c52.737,45.678) U1.24 ; 52.078,44.949 cw(c52.078,44.29) 52.544,44.756 ccw(c52.078,44.29) 52.078,44.949 ; U1.1@52.691,44.949 cw(c52.691,44.903) 52.724,44.936 ccw(c52.691,44.903) U1.1@52.691,44.949
LIGHT: C6.1 D5.1 R6.1 U6.19 | length 13.1
  Top Layer w0.178: v2@53.815,36.837 54.127,36.525 cw(c53.417,35.815) 54.422,35.815 U6.19
  Top Layer w0.305: C6.1 R6.1 ccw(c51.158,37.25) 48.895,37.25 D5.1
  Bottom Layer w0.305: v2(49.251,38.125) 51.435,38.125 cw(c51.435,35.059) 53.603,37.227 v2(54.026,36.805) ; 49.68,38.125 cw(c49.68,38.555) 49.376,38.251 ccw(c49.68,38.555) 49.68,38.125 ; 49.68,38.125 ccw(c49.68,37.696) 49.376,38 cw(c49.68,37.696) 49.68,38.125 ; 53.722,37.108 cw(c53.419,36.805) 53.848,36.805 ccw(c53.419,36.805) 53.722,37.108 ; 53.722,37.108 ccw(c54.026,37.412) 54.026,36.982 cw(c54.026,37.412) 53.722,37.108
NetC3_1: C3.1 R15.1 R16.2 U2.3 | length 6.5
  Top Layer w0.406: v2(42.164,29.87) cw(c43.281,28.754) 43.281,30.333 U2.3 ; v2@42.301,32.158 ccw(c41.808,31.953) 41.808,32.487 42.716,32.487 cw(c42.716,32.197) 42.921,32.402
  Bottom Layer w0.406: v2(42.164,29.87) 42.164,31.537 cw(c43.031,31.537) v2@42.418,32.15
  other v2: 42.418,32.207
NetC4_1: C4.1 R2.1 | length 1.5
  Top Layer w0.254: C4.1 ccw(c54.533,39.649) 53.779,38.896 53.826,38.848 ccw(c54.407,39.429) R2.1
NetC8_1: C8.1 R4.2 R14.2 U2.5 | length 6
  Top Layer w0.762: 45.85,28.931 cw(c46.162,29.244) 45.72,29.244 45.72,30.906 cw(c45.98,30.906) 45.796,31.09 cw(c46.263,30.623) 46.263,31.283 U2.5 ; R4.2 45.909,27.788 cw(c45.909,29.088) C8.1 45.503,28.683 cw(c46.102,28.084) R14.2
NetC14_1: C14.1 R9.1 | length 2.2
  Top Layer w0.254: R9.1 51.054,41.529 cw(c52.197,41.529) 52.197,42.672
NetC16_1: C16.1 L1.1 U2.6 | length 3.2
  Top Layer w0.762: L1.1@45.803,35.103 cw(c45.803,34.322) 46.355,34.874 cw(c44.577,33.096) 47.092,33.096 47.092,32.436
NetC16_2: C16.2 U2.1 | length 1.9
  Top Layer w0.508: U2.1 44.458,32.7 cw(c45.125,32.7) 44.653,33.172 cw(c45.144,32.682) 45.144,33.376 C16.2
NetC30_1: C30.1 U6.22 | length 2.2
  Top Layer w0.178: C30.1 53.177,36.576 cw(c53.177,36.489) 53.238,36.551 cw(c52.917,36.229) 53.372,36.229 U6.22
NetD2_K: D2.K R30.2 | length 4
  Top Layer w0.305: R30.2 D2.K ; 65.913,37.845 cw(c66.668,37.845) 66.134,38.379 ccw(c66.668,37.845) 65.913,37.845 ; 65.913,37.845 ccw(c65.158,37.845) 65.692,38.379 cw(c65.158,37.845) 65.913,37.845
NetD3_K: D3.K R31.2 | length 4
  Top Layer w0.305: R31.2 D3.K ; 63.881,37.845 cw(c64.636,37.845) 64.102,38.379 ccw(c64.636,37.845) 63.881,37.845 ; 63.881,37.845 ccw(c63.126,37.845) 63.66,38.379 cw(c63.126,37.845) 63.881,37.845
NetR14_1: R14.1 U2.4 | length 1.3
  Top Layer w0.762: U2.4@47.168,30.201 cw(c46.965,29.998) 47.252,29.998 R14.1
NetR20_2: R20.2 U6.44 | length 2.2
  Top Layer w0.178: R20.2 ccw(c54.604,28.066) 55.321,28.066 55.321,28.363 ccw(c54.64,28.363) 55.122,28.845 U6.44
NetR36_1: R36.1 U6.17 | length 14.7
  Top Layer w0.178: v2@54.915,36.906 cw(c54.416,36.407) 55.122,36.407 U6.17
  Top Layer w0.254: 50.648,28.346 cw(c50.648,27.12) 51.515,27.987 51.656,27.846 cw(c50.962,27.153) v2(51.943,27.153)
  Bottom Layer w0.254: v2(51.943,27.153) 52.123,27.333 ccw(c51.516,27.94) 52.375,27.94 52.375,32.766 cw(c55.441,32.766) 53.273,34.934 54.595,36.256 ccw(c53.944,36.906) v2(54.864,36.906)
NRST: C21.2 R21.1 T9.1 U6.7 | length 8.1
  Top Layer w0.178: U6.7@57.683,32.458 58.471,32.458 ; 58.477,32.464 cw(c59.206,31.735) 59.206,32.766 v2(59.309,32.766)
  Top Layer w0.305: R21.1 C21.2@60.591,35.743 ; C21.2@60.591,35.743 ccw(c60.591,36.023) 60.848,35.911 cw(c60.591,36.023) C21.2@60.591,35.743 ; C21.2@60.348,35.743 ccw(c60.348,36.502) 60.885,35.965 cw(c60.348,36.502) C21.2@60.348,35.743
  Bottom Layer w0.305: v2(59.309,32.766) ccw(c59.309,33.379) 59.743,32.946 ccw(c58.153,34.536) T9.1@60.401,34.536 ; T9.1@60.757,34.747 60.757,35.226 cw(c61.624,35.226) v2(61.011,35.839)
O: P5.2 R17.1 | length 2.2
  Top Layer w0.508: R17.1 49.022,26.499 ccw(c50.756,26.499) P5.2@49.53,25.273
OP1INN: C1.2 R1.1 U1.3 | length 4.8
  Top Layer w0.254: C1.2 52.074,40.778 ccw(c50.802,42.049) 52.6,42.049 ; R1.1 ccw(c51.19,42.831) 52.794,42.831 52.794,43.599 53.437,44.242 U1.3 ; C1.2@51.936,40.713 ccw(c51.936,40.889) 52.061,40.765 cw(c51.936,40.889) C1.2@51.936,40.713
OP1OUT: C1.1 C4.2 R1.2 U1.4 | length 4.6
  Top Layer w0.254: C4.2@52.366,39.699 ccw(c50.322,41.743) 53.213,41.743 ; 53.238,41.681 cw(c53.3,41.743) 53.213,41.743 ; U1.4 ccw(c53.798,43.88) 53.792,43.886 53.788,43.882 ccw(c55.175,42.494) 53.213,42.494 53.213,41.743
OP2INN: C5.2 R2.2 R3.1 U1.5 | length 4.1
  Top Layer w0.254: U1.5 ccw(c54.151,43.475) 54.109,43.517 ccw(c54.985,42.642) 53.764,42.851 ccw(c54.301,42.851) 53.921,42.472 54.116,42.277 cw(c53.535,41.697) R3.1 54.356,39.881 ccw(c54.529,39.881) R2.2
OP2INP: C15.1 R11.2 U1.7 | length 4.8
  Top Layer w0.254: U1.7 cw(c55.495,43.114) 55.543,43.161 ccw(c56.647,43.161) 55.866,42.381 56.413,41.834 ccw(c56.659,42.08) 56.659,41.732 57.916,41.732 ccw(c57.916,41.906) C15.1@58.039,41.783 ; 56.726,41.732 ccw(c56.726,42.038) 56.942,41.822 cw(c56.726,42.038) 56.726,41.732 ; R11.2@57.104,41.822 ccw(c57.32,42.038) 57.32,41.732 cw(c57.32,42.038) R11.2@57.104,41.822 ; 57.759,41.732 ccw(c57.759,42.014) 57.958,41.815 cw(c57.759,42.014) 57.759,41.732
OP2OUT: C5.1 C10.1 R3.2 R5.1 U1.6 U6.16 | length 12.5
  Top Layer w0.178: U6.16 55.472,35.725 ccw(c55.467,35.73) 55.474,35.73 55.474,37.708 cw(c55.56,37.708) 55.499,37.77
  Top Layer w0.254: R5.1 C10.1 ccw(c52.677,37.732) 52.677,37.592 55.321,37.592 ccw(c55.321,37.77) 55.474,37.678 ccw(c55.321,37.77) 55.499,37.77 55.499,40.782 ccw(c52.449,40.782) 54.606,42.938 cw(c54.849,43.181) U1.6
OPCAP: C14.2 U1.2 | length 1.8
  Top Layer w0.254: 52.197,43.822 cw(c52.698,43.822) 52.698,44.323 ; U1.2 52.818,44.323 52.698,44.323 ; 52.698,44.323 ccw(c52.698,44.556) 52.895,44.431 cw(c52.698,44.556) 52.698,44.323
OUT: R17.2 U6.29 | length 13.3
  Top Layer w0.178: v2(50.571,32.791) cw(c50.612,32.75) 50.612,32.808 U6.29 ; v2@50.742,32.621 cw(c51.195,32.168) 51.195,32.808 ccw(c51.195,32.168) v2@50.742,32.621 ; v2@50.742,32.962 ccw(c51.113,33.333) 51.113,32.808 cw(c51.113,33.333) v2@50.742,32.962
  Top Layer w0.305: R17.2@49.022,28.397 49.022,28.986 cw(c49.195,28.986) v2(49.073,29.108) ; 49.022,28.557 cw(c49.625,28.557) 49.199,28.983 ccw(c49.625,28.557) 49.022,28.557
  Bottom Layer w0.178: v2(49.073,29.108) cw(c49.195,28.986) 49.195,29.159 51.334,29.159 ccw(c51.334,29.525) 51.593,29.266 ccw(c50.809,30.05) 51.918,30.05 ccw(c50.757,30.05) 51.578,30.871 51.218,31.23 cw(c52.779,32.791) v2(50.571,32.791) ; v2@49.243,28.938 cw(c49.778,28.403) 49.778,29.159 ccw(c49.778,28.403) v2@49.243,28.938 ; v2@49.243,29.279 ccw(c49.533,29.568) 49.533,29.159 cw(c49.533,29.568) v2@49.243,29.279
OUT1: P5.3 R36.2 | length 6.4
  Top Layer w0.508: R36.2 ccw(c52.005,27.298) 51.063,26.356 51.919,25.5 ccw(c52.222,25.804) P5.3@52.222,25.375 ; 51.37,26.049 ccw(c52.324,27.003) 52.324,25.654 cw(c52.324,27.003) 51.37,26.049 ; 51.493,25.926 cw(c50.712,25.146) 51.816,25.146 ccw(c50.712,25.146) 51.493,25.926
PULSE: U1.11 U6.42 | length 21.4
  Top Layer w0.178: U6.42@54.422,29.235 54.422,28.662 v2@54.61,28.473
  Top Layer w0.254: U1.11 ccw(c56.925,44.596) 56.914,44.585 57.132,44.367 ccw(c57.912,45.147) v2(57.912,44.044)
  Bottom Layer w0.254: v2(54.635,28.499) 54.289,28.845 ; v2(57.912,44.044) cw(c57.054,43.185) 58.268,43.185 58.268,39.141 cw(c56.367,39.141) 57.711,37.797 54.289,34.375 ccw(c56.457,32.207) 53.391,32.207 53.391,31.013 ccw(c56.457,31.013) 54.289,28.845 ; 54.289,28.845 cw(c53.943,28.499) 54.432,28.499 ccw(c53.943,28.499) 54.289,28.845 ; 54.289,28.845 ccw(c54.635,29.191) 54.635,28.702 cw(c54.635,29.191) 54.289,28.845
RED_LED: R30.1 U6.11 | length 8.9
  Top Layer w0.178: U6.11@57.607,33.858 58.039,33.858 ; 58.045,33.864 58.26,34.079 cw(c59.567,32.772) 59.567,34.62 62.967,34.62 ccw(c62.967,35.661) 63.703,34.925 cw(c64.132,34.496) 64.132,35.103 64.196,35.103 ccw(c64.196,37.531) R30.1
RX2: U1.21 | length 5
  Top Layer w0.203: 49.237,48.06 52.737,48.06 U1.21
SWCLK: P2.2 U6.37 | length 30.4
  Top Layer w0.178: 52.603,29.031 cw(c52.839,29.031) U6.37@52.672,29.198 ; U6.37@52.603,29.312 52.603,28.902 ccw(c54.251,28.902) 53.086,27.737 53.128,27.695 ccw(c55.296,29.863) 55.296,26.797 67.84,26.797 ccw(c67.84,27.664) P2.2 ; 66.215,26.797 ccw(c66.215,29.289) 67.977,27.527 cw(c66.215,29.289) 66.215,26.797 ; 66.644,26.797 ccw(c66.644,28.86) 68.103,27.401 cw(c66.644,28.86) 66.644,26.797 ; 67.073,26.797 ccw(c67.073,28.431) 68.228,27.276 cw(c67.073,28.431) 67.073,26.797 ; 67.441,26.797 cw(c67.441,26.039) 67.977,26.575 ccw(c67.441,26.039) 67.441,26.797 ; 67.503,26.797 ccw(c67.503,28.001) 68.354,27.15 cw(c67.503,28.001) 67.503,26.797
SWDIO: P2.3 U6.34 | length 27.1
  Top Layer w0.178: U6.34 51.155,31.058 ccw(c51.155,30.739) 50.929,30.965 50.811,30.847 ccw(c51.635,30.023) 50.47,30.023 ccw(c51.206,30.023) 50.685,29.502 53.797,26.391 65.904,26.391 cw(c65.904,25.94) 66.223,26.258 v2(66.446,26.035)
  Bottom Layer w0.178: v2(66.446,26.035) 66.446,26.899 ; 66.446,26.618 cw(c65.864,26.618) 66.276,26.206 ccw(c65.864,26.618) 66.446,26.618 ; 66.446,26.618 ccw(c67.029,26.618) 66.617,26.206 cw(c67.029,26.618) 66.446,26.618
  Bottom Layer w0.305: v2(66.446,26.035) 66.446,26.943 cw(c69.221,26.943) 67.259,28.905 67.586,29.232 cw(c68.453,28.365) P2.3
TPVBG: C9.2 U1.18 | length 3.4
  Top Layer w0.254: U1.18 ccw(c55.495,47.736) 55.524,47.736 55.524,49.167 cw(c55.633,49.167) C9.2 ; 55.524,48.295 ccw(c56.083,48.295) 55.688,47.9 cw(c56.083,48.295) 55.524,48.295 ; 55.524,48.979 cw(c55.83,48.979) 55.614,49.195 ccw(c55.83,48.979) 55.524,48.979 ; 55.524,49.067 cw(c55.665,49.067) 55.625,49.202 ccw(c55.665,49.067) 55.524,49.067
TXN: U1.16 | length 4.6
  Top Layer w0.203: U1.16@56.453,47.251 57.263,48.06 ; 57.281,48.06 60.781,48.06
USART2_RX: U6.13
USART2_TX: U6.12
USART_RX: P2.5 U6.2 | length 20.4
  Top Layer w0.178: U6.2@57.683,30.708 58.642,30.708 cw(c58.642,28.975) 59.868,30.201 cw(c59.316,29.649) 60.096,29.649 ; v2@59.854,29.178 ccw(c59.517,29.649) 60.096,29.649 ; v2@59.958,29.033 ccw(c59.765,29.303) 60.096,29.303 ; v2(59.995,28.981) ccw(c59.75,29.227) 60.096,29.227 60.096,29.649 ; 60.096,29.319 ccw(c60.332,29.319) v2@60.165,29.152
  Bottom Layer w0.305: v2@59.905,29.071 cw(c60.301,28.675) 60.301,29.235 ; v2(59.995,28.981) 60.249,29.235 63.271,29.235 ccw(c63.271,32.301) 65.439,30.133 65.989,30.683 ccw(c64.212,32.461) 66.726,32.461 cw(c68.811,32.461) 67.336,33.935 67.803,34.402 cw(c68.453,33.751) P2.5 ; v2@60.121,28.856 cw(c61.037,27.939) 61.037,29.235 ; 67.533,34.132 cw(c68.176,33.49) 68.383,34.374 ccw(c68.176,33.49) 67.533,34.132 ; 67.682,34.281 ccw(c67.292,34.671) 67.843,34.671 cw(c67.292,34.671) 67.682,34.281
USART_TX: P2.6 U6.1 | length 17.6
  Top Layer w0.178: U6.1@57.506,30.328 58.637,30.328 cw(c58.637,29.686) 59.09,30.14 cw(c58.869,29.919) 59.182,29.919 59.182,29.603 cw(c58.662,29.603) 59.03,29.235 cw(c58.907,29.358) 58.907,29.185 v2(58.776,29.185)
  Bottom Layer w0.305: v2(58.776,29.185) cw(c60.247,27.713) 60.247,29.794 63.155,29.794 ccw(c63.155,32.222) 64.872,30.505 65.445,31.079 ccw(c63.581,32.944) 66.218,32.944 66.218,34.112 cw(c69.284,34.112) 67.116,36.28 67.355,36.52 cw(c68.656,35.219) P2.6@68.656,37.059
VBPA: R18.2 R19.1 U1.14 | length 13.4
  Top Layer w0.254: U1.14@56.91,46.293 57.079,46.462 cw(c57.556,45.985) 57.556,46.66 cw(c57.556,45.311) 58.51,46.265 58.737,46.038 cw(c56.742,44.044) v2(59.563,44.044) ; R18.2@59.487,38.964 60.391,38.964 ccw(c60.391,39.05) R19.1 ; 60.099,38.977 60.099,39.349 cw(c60.524,39.349) v2(60.223,39.649) ; 60.099,38.966 cw(c60.773,38.966) 60.351,39.491 ccw(c60.773,38.966) 60.099,38.966
  Bottom Layer w0.254: v2(59.563,44.044) 59.563,41.244 ccw(c61.818,41.244) v2(60.223,39.649) ; 59.563,43.553 cw(c60.054,43.553) 59.707,43.9 ccw(c60.054,43.553) 59.563,43.553 ; 59.563,43.553 ccw(c59.072,43.553) 59.419,43.9 cw(c59.072,43.553) 59.563,43.553
VCTRL: C13.1 R7.2 R8.1 U1.8 | length 11
  Top Layer w0.254: U1.8 cw(c55.849,43.519) 55.86,43.53 56.566,42.824 v2(56.566,42.621) ; v2@56.419,38.487 cw(c56.896,38.01) 56.896,38.684 56.896,37.154 cw(c56.438,37.154) R7.2 ; U1.8@56.075,43.315 cw(c55.381,42.621) 56.363,42.621 ccw(c55.381,42.621) U1.8@56.075,43.315 ; R8.1@56.788,37.765 cw(c56.528,37.505) 56.896,37.505 ccw(c56.528,37.505) R8.1@56.788,37.765 ; R8.1@56.788,37.927 ccw(c56.528,38.187) 56.896,38.187 cw(c56.528,38.187) R8.1@56.788,37.927
  Bottom Layer w0.254: v2(56.312,38.379) ccw(c54.288,40.403) 57.15,40.403 57.15,41.211 ccw(c55.278,41.211) 56.602,42.534 cw(c56.688,42.621) v2(56.566,42.621)
XTALA: C23.2 U6.5 Y1.1 | length 8.7
  Top Layer w0.178: U6.5@57.709,31.758 59.499,31.758 cw(c59.499,30.95) 60.071,31.521 60.732,30.86 cw(c59.279,29.407) 61.334,29.407 C23.2 ; 60.336,31.256 ccw(c61.183,32.104) 61.183,30.905 cw(c61.183,32.104) 60.336,31.256 ; 60.639,30.953 ccw(c61.183,31.497) 61.183,30.728 cw(c61.183,31.497) 60.639,30.953 ; 60.783,30.809 cw(c60.568,30.594) 60.872,30.594 ccw(c60.568,30.594) 60.783,30.809
XTALB: C24.2 U6.6 Y1.3 | length 10.8
  Top Layer w0.178: U6.6@57.709,32.108 59.157,32.108 ; 59.079,32.114 ccw(c59.079,33.24) 59.876,32.444 60.122,32.69 cw(c61.103,31.709) 61.103,33.096 62.205,33.096 cw(c62.205,31.808) 63.115,32.719 63.36,32.474 ccw(c63.759,32.874) 63.759,32.309 ccw(c63.759,31.918) Y1.3 ; 63.102,32.732 cw(c62.824,32.453) 63.167,32.26 ccw(c62.824,32.453) 63.102,32.732
  Top Layer w0.305: Y1.3@63.759,32.309 C24.2 ; Y1.3@63.858,32.019 cw(c64.557,31.32) 64.557,32.309 ccw(c64.557,31.32) Y1.3@63.858,32.019
pads on no net: U1.19 U6.3 U6.4 U6.20 U6.21 U6.25 U6.26 U6.27 U6.28 U6.30 U6.31 U6.32 U6.33 U6.38 U6.39 U6.40 U6.43 U6.45 U6.46 Y1.2 Y1.4

## Polygon pours and split planes (outlines as drawn)
GND on Top Layer "Top Layer-GND" (solid, remove dead copper, pour order 1002): 49.68,54.585 60.32,54.585 60.32,41.697 49.68,41.697
GND on Bottom Layer "Top Layer-No Net" (solid, remove dead copper, pour order 1000): 69.934,54.585 69.934,23.138 39.934,23.138 39.934,54.585

## Keep-outs
Keep-Out Layer:
  the board outline again, w0.254

## Other copper
Top Layer:
  region net TXN: 60.667,48.203 64.439,52.3 69.074,48.033 65.145,43.766 60.695,47.863 60.521,48.023
  region net RX2: 49.333,48.203 45.561,52.3 40.926,48.033 44.855,43.766 49.305,47.863 49.479,48.023
  pour cut-out: 52.598,47.724 52.16,47.286 49.68,47.286 49.68,48.846 51.98,48.846 52.598,48.397
  pour cut-out: 57.402,47.724 57.84,47.286 60.32,47.286 60.32,48.846 58.02,48.846 57.402,48.397

## Silkscreen, mask and mechanical layers (free items; w line width, h text height)
Top Overlay:
  circle w0.508: c60.503,30.124 r0.152
  circle w0.508: c58.293,28.651 r0.339
  lines w0.203: 51.664,41.732 51.664,41.588 ccw(c52.357,41.588) 51.867,41.097 ; 56.032,37.719 cw(c56.094,37.719) 56.05,37.762 56.192,37.904 cw(c56.42,37.675) 56.42,37.998 ; 57.048,42.189 57.048,42.723 ; 57.715,42.239 cw(c57.963,41.991) 57.963,42.342 58.471,42.342 ; 58.522,38.938 ccw(c58.644,38.938) 58.558,38.851 cw(c58.338,38.632) 58.649,38.632 ; 58.547,39.624 60.129,39.624 ccw(c60.129,40.404) 60.681,39.853
  lines w0.254: 50.038,41.935 ccw(c50.467,41.935) 50.164,41.632 50.165,41.631 ccw(c50.489,41.954) 50.489,41.497 50.597,41.497 ; 50.851,38.506 ccw(c50.912,38.568) 50.912,38.481 51.079,38.481 ; 53.488,39.192 53.488,39.001 ccw(c53.504,39.001) 53.492,38.989 ; 54.864,39.37 ccw(c55.337,39.37) 55.002,39.036 ; 55.111,40.224 cw(c55.111,39.877) 55.356,40.122 55.499,39.98
  lines w0.381: 40.488,34.366 41.25,34.366
  text "22.02.11" at 42.901,53.086 h1.52
  text "CD3032ADX" at 60.521,53.086 h1.52
  text "V20" at 43.51,42.266 h1.78
  text "TX" at 67.462,35.484 h1.52
  text "RX" at 67.513,32.918 h1.52
  text "GND" at 66.929,30.48 h1.52
  text "DIO" at 67.335,27.864 h1.52
  text "CLK" at 63.906,26.238 h1.52
  text "O1" at 50.394,25.654 h1.52
  text "A2" at 57.785,25.654 h1.52
  text "A1" at 55.245,25.629 h1.52
  text "O" at 48.463,25.578 h1.52
  text "G" at 60.477,25.552 h1.52
  text "V" at 46.101,25.527 h1.52
  text "3.3V" at 63.957,23.698 h1.52

## Text inside footprints (layer, text, board x,y; h text height)
D5: Top Overlay "+" at 47.422,38.227 h1 r270